# Altium PCB my.PcbDoc (part 3 of 3)
Units mm, origin at the board's own origin, x right, y up, seen from the top; angles counter-clockwise.
Board outline 100 x 100 mm, 4 copper layers (Top Layer, Internal Plane 1, Internal Plane 2, Bottom Layer); 136 components, 166 nets, 575 pads, 210 vias.
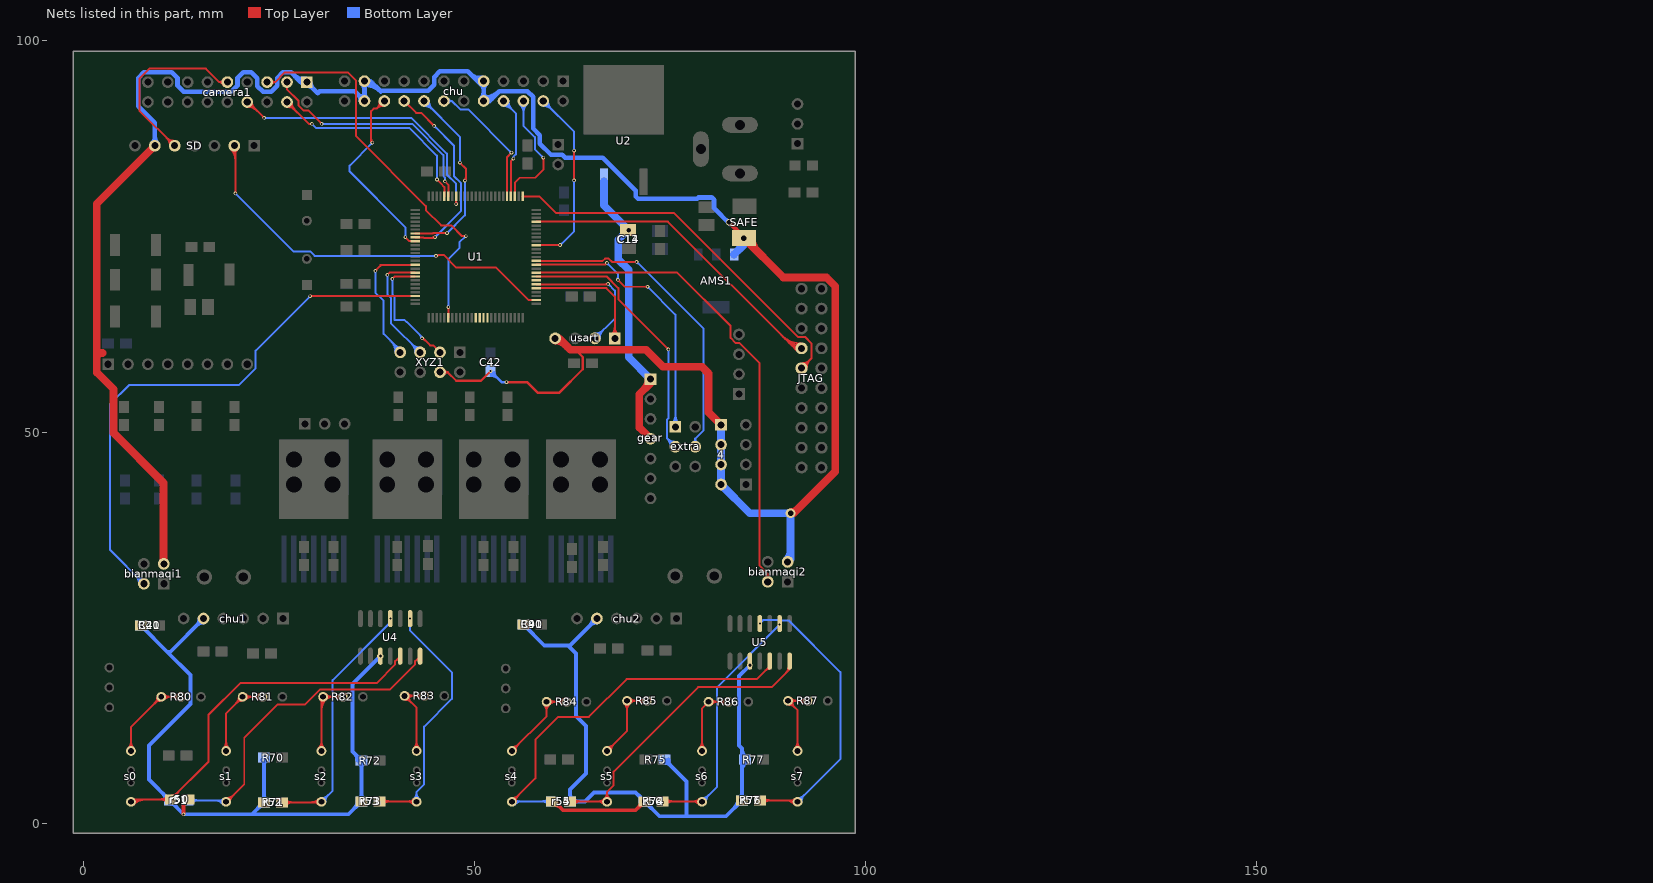
[diagram p5: the nets of this part, all layers, seen from the top]

## Via types
v1: diameter 0.457, hole 0.254, Top Layer to Bottom Layer, 170 vias
v2: diameter 3.5, hole 3, Top Layer to Bottom Layer, 12 vias
v3: diameter 0.8, hole 0.6, Top Layer to Bottom Layer, 7 vias
v4: diameter 1.27, hole 0.711, Top Layer to Bottom Layer, 6 vias
v5: diameter 1, hole 0.6, Top Layer to Bottom Layer, 5 vias
v6: diameter 2.5, hole 2.5, Top Layer to Bottom Layer, tented bottom, 4 vias
v7: diameter 0.7, hole 0.5, Top Layer to Bottom Layer, 2 vias
v8: diameter 0.8, hole 0.4, Top Layer to Bottom Layer, 2 vias
v9: diameter 0.7, hole 0.4, Top Layer to Bottom Layer, 1 vias
v10: diameter 1.2, hole 0.8, Top Layer to Bottom Layer, 1 vias

## Nets (pads, with @x,y where several pads share a name; then routed paths per layer and width w, separated by ;. In a path a pad name is that pad's centre, name@x,y a point inside that pad or via, vN(x,y) a via of type N, cw(c..) or ccw(c..) an arc to the next point about the centre after c; other vN are vias at no path point) (continued)
PC9: chu.4 U1.66 | length 29.9
  Top Layer w0.254: U1.66@57.938,73.913 60.959,73.913 v1(60.96,73.914) ; 60.712,73.913 ccw(c60.712,74.162) v1@60.888,73.986 ; 60.717,73.913 cw(c60.717,73.671) v1@60.888,73.842 ; v1@62.666,82.241 ccw(c62.493,82.414) 62.738,82.414 ccw(c62.983,82.414) v1@62.81,82.241 ; v1@62.666,85.907 cw(c62.493,85.734) 62.738,85.734 cw(c62.983,85.734) v1@62.81,85.907 ; v1(62.738,82.169) v1(62.738,85.979)
  Bottom Layer w0.254: chu.4@58.801,91.706 cw(c58.801,90.202) 59.865,91.265 cw(c60.928,92.329) chu.4@59.424,92.329 ; chu.4@58.801,91.96 cw(c58.801,91.069) 59.431,91.699 cw(c60.061,92.329) chu.4@59.17,92.329 ; chu.4@58.801,92.329 62.738,88.392 v1(62.738,85.979) ; v1(60.96,73.914) 62.738,75.692 v1(62.738,82.169) ; v1@60.96,74.016 ccw(c60.96,74.261) 61.133,74.087 ccw(c61.307,73.914) v1@61.062,73.914 ; v1@62.666,82.097 cw(c62.493,81.924) 62.738,81.924 cw(c62.983,81.924) v1@62.81,82.097 ; v1@62.666,86.051 ccw(c62.493,86.224) 62.738,86.224 ccw(c62.983,86.224) v1@62.81,86.051
PC10: chu.6 U1.78 | length 20.4
  Top Layer w0.254: U1.78@55.165,80.14 55.165,81.869 55.811,82.515 57.75,82.515 58.801,83.566 v1(58.801,85.09) ; v1@58.729,85.018 cw(c58.556,84.845) 58.801,84.845 cw(c59.046,84.845) v1@58.873,85.018
  Bottom Layer w0.254: chu.6@55.82,91.888 cw(c54.757,90.825) 56.261,90.825 cw(c57.765,90.825) chu.6@56.702,91.888 ; chu.6@56,92.068 cw(c55.37,91.438) 56.261,91.438 cw(c57.152,91.438) chu.6@56.522,92.068 ; chu.6@56.261,92.329 56.261,89.175 57.733,87.703 57.733,86.158 v1(58.801,85.09) ; v1@58.699,85.09 ccw(c58.454,85.09) 58.628,85.263 ccw(c58.801,85.437) v1@58.801,85.192
PC11: chu.8 U1.79 | length 16.9
  Top Layer w0.254: U1.79@54.665,80.14 54.665,84.637 v1(54.991,84.963)
  Bottom Layer w0.254: chu.8@53.721,91.706 cw(c53.721,90.202) 54.785,91.265 cw(c55.848,92.329) chu.8@54.344,92.329 ; chu.8@53.721,91.96 cw(c53.721,91.069) 54.351,91.699 cw(c54.981,92.329) chu.8@54.09,92.329 ; chu.8@53.721,92.329 55.293,90.757 55.293,85.495 54.991,85.193 v1(54.991,84.963)
PC12: chu.14 U1.80 | length 18.7
  Top Layer w0.254: U1.80@54.165,80.14 54.165,85.153 v1(54.737,85.725)
  Bottom Layer w0.254: chu.14@46.101,92.329 47.118,92.329 ; chu.14@46.656,92.046 cw(c47.118,91.811) 47.118,92.329 ; chu.14@46.656,92.612 ccw(c47.118,92.847) 47.118,92.329 ; v1@54.635,85.725 ccw(c54.39,85.725) 54.564,85.898 ccw(c54.737,86.072) v1@54.737,85.827 ; v1(54.737,85.725) 49.21,91.252 48.195,91.252 47.118,92.329
PC13: chu.16 U1.7 | length 30.1
  Top Layer w0.254: U1.7@42.415,75.39 44.652,75.39 44.738,75.476 45.198,75.476 45.236,75.438 46.228,75.438 ; 46.223,75.438 cw(c46.223,75.159) v1@46.42,75.356 ; v1@48.133,84.455 v1(48.143,84.445) 48.952,83.636 48.952,82.333 v1(48.778,82.159) ; v1@48.143,84.343 cw(c48.143,84.098) 48.316,84.272 cw(c48.49,84.445) v1@48.245,84.445 ; v1@48.706,82.231 ccw(c48.112,82.825) 48.952,82.825
  Bottom Layer w0.254: chu.16@43.561,91.706 cw(c43.561,90.202) 44.625,91.265 cw(c45.688,92.329) chu.16@44.184,92.329 ; chu.16@43.561,91.96 cw(c43.561,91.069) 44.191,91.699 cw(c44.821,92.329) chu.16@43.93,92.329 ; chu.16@43.561,92.329 48.143,87.747 v1(48.143,84.445) ; v1(46.492,75.428) 48.768,77.704 v1@48.768,82.169 ; v1@46.492,75.53 ccw(c46.492,75.775) 46.665,75.601 ccw(c46.839,75.428) v1@46.594,75.428 ; v1@48.071,84.517 ccw(c47.898,84.69) 48.143,84.69 ccw(c48.388,84.69) v1@48.215,84.517 ; 48.768,81.89 cw(c49.047,81.89) v1@48.85,82.087
PC14: chu.18 U1.8 | length 26.2
  Top Layer w0.254: chu.18@41.021,92.329 41.027,92.329 42.558,90.798 43.187,90.798 v1@44.831,89.154 ; U1.8@42.415,74.89 43.481,74.89 43.547,74.824 44.872,74.824 v1(44.968,74.92) ; 44.492,74.824 ccw(c44.492,75.396) v1@44.896,74.992 ; v1@44.739,89.144 ccw(c44.494,89.144) 44.668,89.317 ccw(c44.841,89.491) v1@44.841,89.246
  Bottom Layer w0.254: v1@44.841,89.042 cw(c44.841,88.797) 45.014,88.971 cw(c45.188,89.144) v1@44.943,89.144 ; v1(44.841,89.144) 47.387,86.598 47.387,82.727 48.26,81.854 48.26,78.232 v1@44.958,74.93 ; v1@45.07,74.92 cw(c45.363,74.92) 45.156,75.128
PC15: chu.20 U1.9 | length 28.7
  Top Layer w0.254: 36.782,87.662 ccw(c37.624,87.662) v1@37.029,87.067 ; v1(36.957,86.995) 36.782,87.17 36.782,91.035 37.108,91.361 37.513,91.361 ; chu.20@37.859,92.286 cw(c36.669,92.205) 37.513,91.361 ; chu.20@38.113,92.304 cw(c37.408,92.255) 37.907,91.755 cw(c38.407,91.256) chu.20@38.456,91.961 ; chu.20@38.438,91.707 ccw(c38.357,90.517) 37.513,91.361 ; chu.20@38.481,92.329 37.513,91.361 ; v1(41.177,74.916) 41.68,74.413 42.392,74.413 U1.9@42.415,74.39
  Bottom Layer w0.254: v1@36.855,86.995 cw(c36.61,86.995) 36.784,86.822 cw(c36.957,86.648) v1@36.957,86.893 ; v1(36.957,86.995) 34.036,84.074 34.036,83.312 41.177,76.171 v1(41.177,74.916) ; v1@41.105,74.987 ccw(c40.932,75.161) 41.177,75.161 ccw(c41.422,75.161) v1@41.249,74.987
PCLK: camera1.5 U1.31 | length 52.7
  Top Layer w0.254: camera1.5@23.495,94.742 24.512,94.742 ; camera1.5@24.05,94.459 cw(c24.512,94.224) 24.512,94.742 ; camera1.5@24.05,95.025 ccw(c24.512,95.26) 24.512,94.742 ; v1@46.593,65.912 cw(c46.42,65.739) 46.665,65.739 cw(c46.91,65.739) v1@46.737,65.912 ; v1@46.658,65.991 v1(46.665,65.984) U1.31@46.665,64.64 ; v1(48.895,75.057) 48.411,75.057 47.03,76.438 45.743,76.438 43.796,78.385 43.796,78.898 34.864,87.83 34.864,94.929 33.847,95.946 25.716,95.946 24.512,94.742
  Bottom Layer w0.254: v1@46.593,66.056 ccw(c46.42,66.229) 46.665,66.229 ccw(c46.91,66.229) v1@46.737,66.056 ; v1(46.665,65.984) 46.665,72.112 48.079,73.526 48.079,74.241 v1(48.895,75.057) ; v1@48.793,75.057 cw(c48.548,75.057) 48.722,74.884 cw(c48.895,74.71) v1@48.895,74.955
PD10: U1.57
PD11: extra.3 U1.58 | length 39.1
  Top Layer w0.254: U1.58@57.915,69.89 66.918,69.89 68.399,68.409 68.399,66.983 v1(74.803,60.579) ; v1@74.701,60.579 ccw(c74.456,60.579) 74.63,60.752 ccw(c74.803,60.926) v1@74.803,60.681
  Bottom Layer w0.254: v1@74.731,60.507 cw(c74.558,60.334) 74.803,60.334 cw(c75.048,60.334) v1@74.875,60.507 ; v1(74.803,60.579) 74.803,51.746 74.615,51.558 74.615,49.21 extra.3@75.692,48.133 ; extra.3@75.069,48.133 ccw(c73.565,48.133) 74.628,49.197 ccw(c75.692,50.26) extra.3@75.692,48.756 ; extra.3@75.323,48.133 ccw(c74.432,48.133) 75.062,48.763 ccw(c75.692,49.393) extra.3@75.692,48.502
PD14: extra.1 U1.61 | length 41.1
  Top Layer w0.254: U1.61@57.915,71.39 57.938,71.413 66.714,71.413 v1(66.929,71.628) ; v1@68.326,69.367 cw(c68.326,69.122) 68.499,69.296 cw(c68.673,69.469) v1@68.428,69.469 ; v1(68.326,69.469) 69.215,68.58 v1(72.136,68.58) ; v1@72.064,68.508 ccw(c71.891,68.335) 71.891,68.58 ccw(c71.891,68.825) v1@72.064,68.652
  Bottom Layer w0.254: v1@66.929,71.526 cw(c66.929,71.281) 67.102,71.455 cw(c67.276,71.628) v1@67.031,71.628 ; v1(66.929,71.628) 68.326,70.231 v1(68.326,69.469) ; v1@68.254,69.541 ccw(c68.081,69.714) 68.326,69.714 ccw(c68.571,69.714) v1@68.398,69.541 ; v1@72.136,68.478 cw(c72.136,68.233) 72.309,68.407 cw(c72.483,68.58) v1@72.238,68.58 ; v1(72.136,68.58) 75.692,65.024 extra.1@75.692,50.673 ; extra.1@75.251,51.114 ccw(c74.188,52.177) 75.692,52.177 ccw(c77.196,52.177) extra.1@76.133,51.114 ; extra.1@75.431,50.934 ccw(c74.801,51.564) 75.692,51.564 ccw(c76.583,51.564) extra.1@75.953,50.934
PD15: extra.4 U1.62 | length 42.7
  Top Layer w0.254: U1.62@57.915,71.89 66.405,71.89 66.699,72.184 67.159,72.184 67.588,71.755 v1(70.739,71.755) ; v1@70.667,71.683 ccw(c70.494,71.51) 70.494,71.755 ccw(c70.494,72) v1@70.667,71.827
  Bottom Layer w0.254: v1@70.739,71.653 cw(c70.739,71.408) 70.912,71.582 cw(c71.086,71.755) v1@70.841,71.755 ; v1(70.739,71.755) 79.309,63.185 79.309,50.227 78.232,49.15 ; extra.4@77.949,48.688 ccw(c77.714,49.15) 78.232,49.15 ; extra.4@78.232,48.133 78.232,49.15 ; extra.4@78.515,48.688 cw(c78.75,49.15) 78.232,49.15
PE7: U1.38
PE8: U1.39
PE9: U1.40
PE10: U1.41
SCL: camera1.3 U1.95 | length 31.1
  Top Layer w0.254: camera1.3@26.035,94.742 26.035,93.853 27.498,92.39 27.498,91.756 28.129,91.125 28.763,91.125 v1(30.48,89.408) ; v1@30.378,89.408 ccw(c30.133,89.408) 30.307,89.581 ccw(c30.48,89.755) v1@30.48,89.51 ; v1(46.228,82.042) 46.665,81.605 U1.95@46.665,80.14
  Bottom Layer w0.254: v1(30.48,89.408) 42.03,89.408 46.028,85.41 46.028,82.743 46.228,82.543 v1(46.228,82.042) ; v1@30.552,89.336 cw(c30.725,89.163) 30.725,89.408 cw(c30.725,89.653) v1@30.552,89.48
SCLK0: SD.2 U1.52 | length 55.2
  Top Layer w0.254: SD.2@18.863,86.173 cw(c17.493,84.803) 19.431,84.803 ; SD.2@19.043,86.353 cw(c18.107,85.417) 19.431,85.417 cw(c20.501,85.417) SD.2@19.745,86.173 ; SD.2@19.304,86.614 19.431,86.487 v1(19.431,80.518) ; v1@19.359,80.59 ccw(c19.186,80.763) 19.431,80.763 ccw(c19.676,80.763) v1@19.503,80.59 ; v1@45.157,72.445 cw(c45.637,71.965) 45.637,72.644 ; 45.339,72.644 46.063,72.644 47.679,71.028 52.771,71.028 56.909,66.89 U1.52@57.915,66.89
  Bottom Layer w0.254: v1@19.431,80.416 cw(c19.431,80.171) 19.604,80.345 cw(c19.778,80.518) v1@19.533,80.518 ; v1(19.431,80.518) 26.851,73.098 28.996,73.098 29.577,72.517 v1(45.085,72.517) ; v1@45.013,72.445 ccw(c44.84,72.272) 44.84,72.517 ccw(c44.84,72.762) v1@45.013,72.589
SDA: camera1.4 U1.96 | length 31.8
  Top Layer w0.254: camera1.4@26.035,91.579 cw(c26.035,90.075) 27.099,91.138 cw(c28.162,92.202) camera1.4@26.658,92.202 ; camera1.4@26.035,91.833 cw(c26.035,90.942) 26.665,91.572 cw(c27.295,92.202) camera1.4@26.404,92.202 ; camera1.4@26.035,92.202 28.829,89.408 v1(29.21,89.408) ; v1(45.212,82.296) 45.672,81.836 45.672,81.812 46.165,81.319 U1.96@46.165,80.14
  Bottom Layer w0.254: v1(29.21,89.408) 29.766,88.852 30.71,88.852 30.758,88.9 41.656,88.9 45.212,85.344 v1(45.212,82.296) ; v1@45.14,82.368 ccw(c44.967,82.541) 45.212,82.541 ccw(c45.457,82.541) v1@45.284,82.368
ST0: r50.2 s0.4 U4.5 | length 64.6
  Top Layer w0.254: s0.4@6.088,2.731 6.406,3.05 r50.2@11.176,3.05 16,7.874 16.002,7.874 16.002,13.843 20.066,17.907 37.488,17.907 39.87,20.289 39.87,20.706 U4.5@40.513,21.349 ; 9.823,3.05 cw(c9.823,1.823) 10.69,2.69 ccw(c9.823,1.823) 9.823,3.05 ; 9.823,3.05 ccw(c9.823,4.276) 10.69,3.409 cw(c9.823,4.276) 9.823,3.05 ; s0.4@6.08,2.738 cw(c6.833,1.986) 6.833,3.05 ccw(c6.833,1.986) s0.4@6.08,2.738 ; s0.4@6.26,2.558 cw(c7.446,1.373) 7.446,3.05 ccw(c7.446,1.373) s0.4@6.26,2.558 ; s0.4@6.44,2.379 cw(c8.059,0.759) 8.059,3.05 ccw(c8.059,0.759) s0.4@6.44,2.379 ; r50.2@11.303,3.558 ccw(c11.303,4.477) 11.953,3.827 cw(c11.303,4.477) r50.2@11.303,3.558 ; r50.2@11.557,3.05 cw(c12.477,3.05) 11.826,3.7 ccw(c12.477,3.05) r50.2@11.557,3.05 ; r50.2@11.811,3.05 cw(c13.344,3.05) 12.26,4.134 ccw(c13.344,3.05) r50.2@11.811,3.05 ; 39.912,20.748 cw(c40.354,20.306) 40.696,20.829 ccw(c40.354,20.306) 39.912,20.748
ST1: r51.2 s1.4 U4.7 | length 57.6
  Top Layer w0.254: s1.4@18.263,2.731 18.352,2.731 20.574,4.953 20.574,10.922 24.854,15.202 28.359,15.202 30.263,17.106 39.227,17.106 42.41,20.289 42.41,20.706 U4.7@43.053,21.349 ; s1.4@18.263,2.975 ccw(c18.263,3.78) 18.832,3.211 cw(c18.263,3.78) s1.4@18.263,2.975 ; s1.4@18.263,3.229 ccw(c18.263,4.647) 19.265,3.644 cw(c18.263,4.647) s1.4@18.263,3.229 ; s1.4@18.761,2.731 cw(c19.747,2.731) 19.049,3.428 ccw(c19.747,2.731) s1.4@18.761,2.731 ; 42.452,20.748 cw(c42.894,20.306) 43.236,20.829 ccw(c42.894,20.306) 42.452,20.748
  Bottom Layer w0.254: r51.2@13.335,2.923 18.071,2.923 s1.4@18.263,2.731 ; 14.688,2.923 cw(c14.688,4.149) 13.821,3.282 ccw(c14.688,4.149) 14.688,2.923 ; 14.688,2.923 ccw(c14.688,1.696) 13.821,2.563 cw(c14.688,1.696) 14.688,2.923 ; 16.598,2.923 cw(c16.598,1.066) 17.91,2.379 ccw(c16.598,1.066) 16.598,2.923 ; 17.211,2.923 cw(c17.211,1.679) 18.09,2.558 ccw(c17.211,1.679) 17.211,2.923 ; 17.523,2.923 ccw(c17.523,3.471) 17.91,3.083 cw(c17.523,3.471) 17.523,2.923
ST2: r52.2 s2.4 U4.11 | length 44.8
  Top Layer w0.254: r52.2@25.4,2.665 30.372,2.665 s2.4@30.438,2.731 ; 26.753,2.665 cw(c26.753,3.892) 25.886,3.025 ccw(c26.753,3.892) 26.753,2.665 ; 26.753,2.665 ccw(c26.753,1.439) 25.886,2.306 cw(c26.753,1.439) 26.753,2.665 ; 29.077,2.665 ccw(c29.077,4.092) 30.085,3.083 cw(c29.077,4.092) 29.077,2.665 ; 29.394,2.665 cw(c29.394,1.687) 30.085,2.379 ccw(c29.394,1.687) 29.394,2.665 ; 29.69,2.665 ccw(c29.69,3.478) 30.265,2.904 cw(c29.69,3.478) 29.69,2.665
  Bottom Layer w0.254: s2.4@30.438,2.731 31.877,4.17 31.877,18.288 39.243,25.654 v1(39.243,26.162) ; 31.288,3.581 cw(c30.438,4.431) 30.438,3.229 ccw(c30.438,4.431) 31.288,3.581 ; 31.288,3.581 ccw(c32.138,2.731) 30.936,2.731 cw(c32.138,2.731) 31.288,3.581
ST3: r53.2 s3.4 U4.9 | length 45.7
  Top Layer w0.254: r53.2@37.846,2.792 42.551,2.792 s3.4@42.613,2.731 ; 39.199,2.792 cw(c39.199,4.019) 38.332,3.152 ccw(c39.199,4.019) 39.199,2.792 ; 39.199,2.792 ccw(c39.199,1.566) 38.332,2.433 cw(c39.199,1.566) 39.199,2.792 ; 41.262,2.792 cw(c41.262,1.381) 42.26,2.379 ccw(c41.262,1.381) 41.262,2.792 ; 41.558,2.792 ccw(c41.558,3.785) 42.26,3.083 cw(c41.558,3.785) 41.558,2.792 ; 41.875,2.792 cw(c41.875,1.994) 42.44,2.558 ccw(c41.875,1.994) 41.875,2.792
  Bottom Layer w0.254: v1(41.783,26.162) 41.783,24.612 47.104,19.291 47.104,15.887 43.565,12.348 43.565,4.963 42.613,4.011 s3.4@42.613,2.731 ; 41.783,25.917 cw(c42.028,25.917) 41.855,26.09 ccw(c42.028,25.917) 41.783,25.917 ; 41.783,25.917 ccw(c41.538,25.917) 41.711,26.09 cw(c41.538,25.917) 41.783,25.917 ; 42.613,3.933 cw(c41.41,3.933) 42.26,3.083 ccw(c41.41,3.933) 42.613,3.933 ; 42.613,3.933 ccw(c43.815,3.933) 42.965,3.083 cw(c43.815,3.933) 42.613,3.933
ST4: r54.2 s4.4 U5.5 | length 62.8
  Top Layer w0.254: s4.4@54.788,2.731 57.785,5.729 57.785,10.668 60.706,13.589 64.643,13.589 69.469,18.415 86.106,18.415 87.757,20.066 U5.5@87.757,20.714 ; 55.638,3.581 cw(c54.788,4.431) 54.788,3.229 ccw(c54.788,4.431) 55.638,3.581 ; 55.638,3.581 ccw(c56.488,2.731) 55.286,2.731 cw(c56.488,2.731) 55.638,3.581 ; 87.202,19.511 cw(c87.757,18.956) 87.757,19.741 ccw(c87.757,18.956) 87.202,19.511
  Bottom Layer w0.254: s4.4@54.788,2.731 54.849,2.792 r54.2@59.944,2.792 ; 58.591,2.792 cw(c58.591,1.566) 59.458,2.433 ccw(c58.591,1.566) 58.591,2.792 ; 58.591,2.792 ccw(c58.591,4.019) 59.458,3.152 cw(c58.591,4.019) 58.591,2.792 ; s4.4@54.96,2.558 cw(c55.525,1.994) 55.525,2.792 ccw(c55.525,1.994) s4.4@54.96,2.558 ; s4.4@55.14,2.379 cw(c56.138,1.381) 56.138,2.792 ccw(c56.138,1.381) s4.4@55.14,2.379 ; s4.4@55.14,3.083 ccw(c55.842,3.785) 55.842,2.792 cw(c55.842,3.785) s4.4@55.14,3.083
ST5: r55.2 s5.4 U5.7 | length 52.1
  Top Layer w0.254: r55.2@62.23,2.792 66.901,2.792 s5.4@66.963,2.731 66.963,4.011 67.79,4.838 67.79,6.576 78.613,17.399 88.011,17.399 90.297,19.685 U5.7@90.297,20.714 ; 63.583,2.792 cw(c63.583,4.019) 62.716,3.152 ccw(c63.583,4.019) 63.583,2.792 ; 63.583,2.792 ccw(c63.583,1.566) 62.716,2.433 cw(c63.583,1.566) 63.583,2.792 ; s5.4@66.61,3.083 cw(c65.908,3.785) 65.908,2.792 ccw(c65.908,3.785) s5.4@66.61,3.083 ; s5.4@66.61,3.083 ccw(c65.76,3.933) 66.963,3.933 ; s5.4@66.61,3.083 ccw(c65.76,3.933) 66.963,3.933 ; 66.963,3.933 ccw(c68.165,3.933) 67.315,3.083 cw(c68.165,3.933) 66.963,3.933 ; 65.612,2.792 cw(c65.612,1.381) 66.61,2.379 ccw(c65.612,1.381) 65.612,2.792 ; 66.225,2.792 cw(c66.225,1.994) 66.79,2.558 ccw(c66.225,1.994) 66.225,2.792 ; 89.84,19.228 ccw(c89.153,19.914) 90.124,19.914 cw(c89.153,19.914) 89.84,19.228
ST6: r56.2 s6.4 U5.9 | length 45.3
  Top Layer w0.254: r56.2@74.041,2.792 79.039,2.792 s6.4@79.1,2.731 ; 75.394,2.792 cw(c75.394,4.019) 74.527,3.152 ccw(c75.394,4.019) 75.394,2.792 ; 75.394,2.792 ccw(c75.394,1.566) 74.527,2.433 cw(c75.394,1.566) 75.394,2.792 ; 77.75,2.792 cw(c77.75,1.381) 78.748,2.379 ccw(c77.75,1.381) 77.75,2.792 ; 78.046,2.792 ccw(c78.046,3.785) 78.748,3.083 cw(c78.046,3.785) 78.046,2.792 ; 78.363,2.792 cw(c78.363,1.994) 78.927,2.558 ccw(c78.363,1.994) 78.363,2.792
  Bottom Layer w0.254: s6.4@79.1,2.731 81.026,4.657 81.026,17.399 v1(89.027,25.4) ; 79.95,3.581 cw(c79.1,4.431) 79.1,3.229 ccw(c79.1,4.431) 79.95,3.581 ; 79.95,3.581 ccw(c80.8,2.731) 79.598,2.731 cw(c80.8,2.731) 79.95,3.581 ; 88.854,25.227 cw(c89.027,25.053) 89.027,25.298 ccw(c89.027,25.053) 88.854,25.227 ; 88.854,25.227 ccw(c88.68,25.4) 88.925,25.4 cw(c88.68,25.4) 88.854,25.227
ST7: r57.2 s7.4 U5.11 | length 50.3
  Top Layer w0.254: r57.2@86.487,2.919 91.124,2.919 s7.4@91.312,2.731 ; 87.84,2.919 cw(c87.84,4.146) 86.973,3.279 ccw(c87.84,4.146) 87.84,2.919 ; 87.84,2.919 ccw(c87.84,1.693) 86.973,2.56 cw(c87.84,1.693) 87.84,2.919 ; 89.655,2.919 cw(c89.655,1.074) 90.96,2.379 ccw(c89.655,1.074) 89.655,2.919 ; 90.269,2.919 cw(c90.269,1.687) 91.14,2.558 ccw(c90.269,1.687) 90.269,2.919 ; 90.565,2.919 ccw(c90.565,3.479) 90.96,3.083 cw(c90.565,3.479) 90.565,2.919
  Bottom Layer w0.254: v1(86.487,25.527) 86.916,25.956 89.257,25.956 89.305,25.908 90.17,25.908 96.774,19.304 96.774,8.193 s7.4@91.312,2.731 ; 92.163,3.581 cw(c91.312,4.431) 91.312,3.229 ccw(c91.312,4.431) 92.163,3.581 ; 92.163,3.581 ccw(c93.013,2.731) 91.81,2.731 cw(c93.013,2.731) 92.163,3.581
T0: R80.2 R80.3 s0.1 | length 26.2
  Top Layer w0.254: s0.1@6.088,9.231 6.088,12.285 R80.3@9.957,16.154 R80.2@12.497,16.154 ; 6.088,10.433 cw(c4.885,10.433) 5.735,9.583 ccw(c4.885,10.433) 6.088,10.433 ; 6.088,10.433 ccw(c7.29,10.433) 6.44,9.583 cw(c7.29,10.433) 6.088,10.433 ; 9.107,15.304 cw(c9.957,14.454) 9.957,15.656 ccw(c9.957,14.454) 9.107,15.304 ; 9.107,15.304 ccw(c8.257,16.154) 9.459,16.154 cw(c8.257,16.154) 9.107,15.304 ; 11.159,16.154 cw(c11.159,17.357) 10.309,16.507 ccw(c11.159,17.357) 11.159,16.154 ; 11.159,16.154 ccw(c11.159,14.952) 10.309,15.802 cw(c11.159,14.952) 11.159,16.154 ; 11.295,16.154 cw(c11.295,14.952) 12.145,15.802 ccw(c11.295,14.952) 11.295,16.154 ; 11.295,16.154 ccw(c11.295,17.357) 12.145,16.507 cw(c11.295,17.357) 11.295,16.154
T1: R81.2 R81.3 s1.1 | length 25.4
  Top Layer w0.254: s1.1@18.263,9.231 18.263,14.046 R81.3@20.371,16.154 R81.2@22.911,16.154 ; 18.263,10.433 cw(c17.06,10.433) 17.91,9.583 ccw(c17.06,10.433) 18.263,10.433 ; 18.263,10.433 ccw(c19.465,10.433) 18.615,9.583 cw(c19.465,10.433) 18.263,10.433 ; 19.521,15.304 cw(c20.371,14.454) 20.371,15.656 ccw(c20.371,14.454) 19.521,15.304 ; 19.521,15.304 ccw(c18.671,16.154) 19.873,16.154 cw(c18.671,16.154) 19.521,15.304 ; 21.573,16.154 cw(c21.573,17.357) 20.723,16.507 ccw(c21.573,17.357) 21.573,16.154 ; 21.573,16.154 ccw(c21.573,14.952) 20.723,15.802 cw(c21.573,14.952) 21.573,16.154 ; 21.709,16.154 cw(c21.709,14.952) 22.559,15.802 ccw(c21.709,14.952) 21.709,16.154 ; 21.709,16.154 ccw(c21.709,17.357) 22.559,16.507 cw(c21.709,17.357) 21.709,16.154
T2: R82.2 R82.3 s2.1 | length 26.8
  Top Layer w0.254: s2.1@30.438,9.231 30.438,15.934 R82.3@30.658,16.154 R82.2@33.198,16.154 ; 30.438,10.433 cw(c29.235,10.433) 30.085,9.583 ccw(c29.235,10.433) 30.438,10.433 ; 30.438,10.433 ccw(c31.64,10.433) 30.79,9.583 cw(c31.64,10.433) 30.438,10.433 ; R82.3@31.01,15.802 cw(c31.86,14.952) 31.86,16.154 ; R82.3@31.01,15.802 ccw(c32.392,14.42) 30.438,14.42 cw(c32.392,14.42) R82.3@31.01,15.802 ; R82.3@31.01,15.802 cw(c31.86,14.952) 31.86,16.154 ; 31.86,16.154 cw(c31.86,17.357) 31.01,16.507 ccw(c31.86,17.357) 31.86,16.154 ; 31.996,16.154 cw(c31.996,14.952) 32.846,15.802 ccw(c31.996,14.952) 31.996,16.154 ; 31.996,16.154 ccw(c31.996,17.357) 32.846,16.507 cw(c31.996,17.357) 31.996,16.154 ; R82.3@30.306,15.802 cw(c29.987,15.484) 30.438,15.484 ccw(c29.987,15.484) R82.3@30.306,15.802 ; 30.438,15.033 cw(c31.779,15.033) 30.83,15.982 ccw(c31.779,15.033) 30.438,15.033
T3: R83.2 R83.3 s3.1 | length 25.3
  Top Layer w0.254: s3.1@42.613,9.231 42.613,14.741 R83.3@41.072,16.281 R83.2@43.612,16.281 ; 41.922,15.431 cw(c42.772,16.281) 41.57,16.281 ccw(c42.772,16.281) 41.922,15.431 ; 41.922,15.431 ccw(c41.072,14.581) 41.072,15.783 cw(c41.072,14.581) 41.922,15.431 ; 42.274,16.281 cw(c42.274,17.484) 41.424,16.634 ccw(c42.274,17.484) 42.274,16.281 ; 42.274,16.281 ccw(c42.274,15.079) 41.424,15.929 cw(c42.274,15.079) 42.274,16.281 ; 42.41,16.281 cw(c42.41,15.079) 43.26,15.929 ccw(c42.41,15.079) 42.41,16.281 ; 42.41,16.281 ccw(c42.41,17.484) 43.26,16.634 cw(c42.41,17.484) 42.41,16.281 ; 42.613,10.433 cw(c41.41,10.433) 42.26,9.583 ccw(c41.41,10.433) 42.613,10.433 ; 42.613,10.433 ccw(c43.815,10.433) 42.965,9.583 cw(c43.815,10.433) 42.613,10.433
T4: R84.2 R84.3 s4.1 | length 25.8
  Top Layer w0.254: s4.1@54.788,9.231 59.233,13.676 R84.3@59.233,15.519 R84.2@61.773,15.519 ; 55.638,10.081 cw(c54.788,10.931) 54.788,9.729 ccw(c54.788,10.931) 55.638,10.081 ; 55.638,10.081 ccw(c56.488,9.231) 55.286,9.231 cw(c56.488,9.231) 55.638,10.081 ; 59.233,14.317 cw(c60.435,14.317) R84.3@59.585,15.167 ; 59.233,14.317 ccw(c58.031,14.317) 58.881,15.167 cw(c58.031,14.317) 59.233,14.317 ; 59.233,14.317 cw(c60.435,14.317) R84.3@59.585,15.167 ; R84.3@59.585,15.167 cw(c60.435,14.317) 60.435,15.519 ; R84.3@59.585,15.167 cw(c60.435,14.317) 60.435,15.519 ; 60.435,15.519 cw(c60.435,16.722) 59.585,15.872 ccw(c60.435,16.722) 60.435,15.519 ; 60.571,15.519 cw(c60.571,14.317) 61.421,15.167 ccw(c60.571,14.317) 60.571,15.519 ; 60.571,15.519 ccw(c60.571,16.722) 61.421,15.872 cw(c60.571,16.722) 60.571,15.519
T5: R85.2 R85.3 s5.1 | length 25.1
  Top Layer w0.254: s5.1@66.963,9.231 69.52,11.788 R85.3@69.52,15.646 R85.2@72.06,15.646 ; 67.813,10.081 cw(c66.963,10.931) 66.963,9.729 ccw(c66.963,10.931) 67.813,10.081 ; 67.813,10.081 ccw(c68.663,9.231) 67.461,9.231 cw(c68.663,9.231) 67.813,10.081 ; 69.52,14.444 cw(c70.722,14.444) R85.3@69.872,15.294 ; 69.52,14.444 ccw(c68.318,14.444) 69.168,15.294 cw(c68.318,14.444) 69.52,14.444 ; 69.52,14.444 cw(c70.722,14.444) R85.3@69.872,15.294 ; R85.3@69.872,15.294 cw(c70.722,14.444) 70.722,15.646 ; R85.3@69.872,15.294 cw(c70.722,14.444) 70.722,15.646 ; 70.722,15.646 cw(c70.722,16.849) 69.872,15.999 ccw(c70.722,16.849) 70.722,15.646 ; 70.858,15.646 cw(c70.858,14.444) 71.708,15.294 ccw(c70.858,14.444) 70.858,15.646 ; 70.858,15.646 ccw(c70.858,16.849) 71.708,15.999 cw(c70.858,16.849) 70.858,15.646
T6: R86.2 R86.3 s6.1 | length 20.5
  Top Layer w0.254: s6.1@79.1,9.231 79.1,14.686 R86.3@79.934,15.519 R86.2@82.474,15.519 ; 79.1,10.433 cw(c77.898,10.433) 78.748,9.583 ccw(c77.898,10.433) 79.1,10.433 ; 79.1,10.433 ccw(c80.302,10.433) 79.452,9.583 cw(c80.302,10.433) 79.1,10.433 ; 81.136,15.519 cw(c81.136,16.722) 80.286,15.872 ccw(c81.136,16.722) 81.136,15.519 ; 81.136,15.519 ccw(c81.136,14.317) 80.286,15.167 cw(c81.136,14.317) 81.136,15.519 ; 81.272,15.519 cw(c81.272,14.317) 82.122,15.167 ccw(c81.272,14.317) 81.272,15.519 ; 81.272,15.519 ccw(c81.272,16.722) 82.122,15.872 cw(c81.272,16.722) 81.272,15.519
T7: R87.2 R87.3 s7.1 | length 24.6
  Top Layer w0.254: s7.1@91.312,9.231 91.312,14.428 R87.3@90.094,15.646 R87.2@92.634,15.646 ; 90.944,14.796 cw(c91.794,15.646) 90.592,15.646 ccw(c91.794,15.646) 90.944,14.796 ; 90.944,14.796 ccw(c90.094,13.946) 90.094,15.148 cw(c90.094,13.946) 90.944,14.796 ; 91.296,15.646 cw(c91.296,16.849) 90.446,15.999 ccw(c91.296,16.849) 91.296,15.646 ; 91.296,15.646 ccw(c91.296,14.444) 90.446,15.294 cw(c91.296,14.444) 91.296,15.646 ; 91.312,10.433 cw(c90.11,10.433) 90.96,9.583 ccw(c90.11,10.433) 91.312,10.433 ; 91.312,10.433 ccw(c92.515,10.433) 91.665,9.583 cw(c92.515,10.433) 91.312,10.433 ; 91.432,15.646 cw(c91.432,14.444) 92.282,15.294 ccw(c91.432,14.444) 91.432,15.646 ; 91.432,15.646 ccw(c91.432,16.849) 92.282,15.999 cw(c91.432,16.849) 91.432,15.646
TCK: JTAG.9 U1.76 | length 52.2
  Top Layer w0.254: U1.76@56.165,80.14 58.29,80.14 60.452,77.978 75.528,77.978 91.337,62.169 92.263,62.169 93.091,61.341 93.091,59.436 JTAG.9@91.821,58.166 ; JTAG.9@91.858,58.535 ccw(c91.858,59.336) 92.424,58.769 ; JTAG.9@91.858,58.789 ccw(c91.858,60.203) 92.858,59.203 ; JTAG.9@92.227,58.166 cw(c93.209,58.166) 92.515,58.86 ; JTAG.9@92.481,58.166 cw(c94.076,58.166) 92.948,59.293
TMS: JTAG.7 U1.72 | length 49.8
  Top Layer w0.254: U1.72@57.915,76.89 57.938,76.913 74.725,76.913 90.932,60.706 JTAG.7@91.821,60.706 ; 89.266,62.372 ccw(c91.784,64.889) JTAG.7@91.784,61.329 ; 89.7,61.938 ccw(c91.784,64.022) JTAG.7@91.784,61.075 ; 90.134,61.504 ccw(c91.784,63.155) JTAG.7@91.784,60.821 ; 90.567,61.071 ccw(c91.784,62.287) JTAG.7@91.784,60.567 ; 91.001,60.637 ccw(c91.784,61.42) JTAG.7@91.784,60.313
"USART RX": U1.56 usart.2 | length 22.1
  Top Layer w0.254: U1.56@57.915,68.89 67.112,68.89 v1@67.148,68.926 ; 66.722,68.89 ccw(c66.722,69.301) v1@67.012,69.01
  Bottom Layer w0.254: usart.2@65.405,61.976 67.945,64.516 67.945,68.078 v1(67.084,68.939) ; usart.2@65.405,62.345 ccw(c65.405,63.236) 66.035,62.606 ccw(c66.665,61.976) usart.2@65.774,61.976 ; usart.2@65.405,62.599 ccw(c65.405,64.103) 66.469,63.04 ccw(c67.532,61.976) usart.2@66.028,61.976 ; v1@67.084,68.837 cw(c67.084,68.592) 67.257,68.765 cw(c67.431,68.939) v1@67.186,68.939
"USART TX": U1.55 usart.1 | length 19.6
  Top Layer w0.254: U1.55@57.915,68.39 66.865,68.39 67.945,67.31 usart.1@67.945,61.976 ; usart.1@67.504,62.417 ccw(c66.441,63.48) 67.945,63.48 ccw(c69.449,63.48) usart.1@68.386,62.417 ; usart.1@67.684,62.237 ccw(c67.054,62.867) 67.945,62.867 ccw(c68.836,62.867) usart.1@68.206,62.237
VCC: 4.1 4.2 4.3 4.4 AMS1.3 bianmaqi1.3 bianmaqi2.3 C42.1 camera1.1 chu.9 chu.10 chu.21 chu.22 SAFE.1 SD.6 usart.4 XYZ1.4 | length 346.1
  Top Layer w0.3: XYZ1.4@45.593,57.658 46.577,57.658 ; XYZ1.4@46.126,57.383 cw(c46.577,57.151) 46.577,57.658 ; XYZ1.4@46.126,57.933 ccw(c46.577,58.165) 46.577,57.658 ; v1(52.068,57.785) 50.841,56.558 47.677,56.558 46.577,57.658 ; v1(54.102,56.388) 56.72,56.388 58.058,55.05 60.877,55.05 63.85,58.023 63.85,59.583 62.907,60.526 62.557,60.876 61.914,60.876 61.425,60.876 usart.4@60.325,61.976 ; usart.4@60.325,61.376 cw(c60.325,59.927) 61.349,60.952 cw(c62.374,61.976) usart.4@60.925,61.976
  Top Layer w0.6: v3(82.55,76.835) 84.455,74.93 v4(84.455,74.803) ; 83.3,76.085 cw(c82.018,74.803) SAFE.1@83.831,74.803 ; SAFE.1@83.793,75.592 cw(c83.005,74.803) SAFE.1@84.12,74.803
  Top Layer w1: 2.443,60.124 2.135,60.124 1.725,59.714 ; SD.6@9.144,86.614 1.725,79.195 1.725,59.714 ; bianmaqi1.3@10.287,33.147 10.247,33.187 10.247,43.501 3.874,49.875 3.874,55.485 1.725,57.634 1.725,59.714 ; usart.4@60.325,61.726 cw(c60.325,59.941) 61.587,61.203 ; usart.4@60.325,61.976 60.814,61.976 61.914,60.876 62.264,60.526 62.907,60.526 71.935,60.526 74.115,58.346 79.087,58.346 79.936,57.497 79.936,52.525 4.1@81.534,50.927 ; v4(84.455,74.803) 89.482,69.776 94.999,69.776 96.139,68.636 96.139,44.958 90.805,39.624 v4(90.424,39.624) ; SAFE.1@85.479,74.803 ccw(c87.951,74.803) 86.203,73.055 ; v4@90.424,39.759 ccw(c90.424,41.005) 91.305,40.124
  Bottom Layer w0.3: C42.1@52.068,57.173 cw(c52.068,55.695) 53.113,56.74 ; C42.1@52.068,57.473 cw(c52.068,56.72) C42.1@52.601,57.252 ; v1(52.068,57.785) 53.465,56.388 v1(54.102,56.388) ; C42.1@52.553,57.658 ccw(c53.418,57.658) 52.807,57.047
  Bottom Layer w0.6: SD.6@8.826,86.932 ccw(c8.058,87.7) 9.144,87.7 ccw(c10.23,87.7) SD.6@9.462,86.932 ; SD.6@9.144,86.614 9.144,89.545 7.005,91.684 7.005,95.26 7.737,95.992 11.313,95.992 12.045,95.26 12.045,94.264 12.817,93.492 18.933,93.492 19.705,94.264 19.705,95.26 20.437,95.992 21.473,95.992 22.245,95.22 22.245,94.224 22.977,93.492 24.013,93.492 24.785,94.264 24.785,95.26 25.517,95.992 26.553,95.992 27.803,94.742 camera1.1@28.575,94.742 29.972,93.345 30.206,93.579 34.691,93.579 chu.22@35.941,92.329 chu.21@35.941,94.869 36.713,94.869 37.963,93.619 44.079,93.619 44.851,94.391 44.851,95.387 45.583,96.119 49.159,96.119 51.181,94.097 chu.10@51.181,92.329 51.953,92.329 53.203,93.579 ; 26.939,95.606 ccw(c28.082,96.749) camera1.1@28.468,95.179 ; 27.692,94.853 ccw(c28.379,95.54) camera1.1@28.611,94.596 ; camera1.1@28.575,94.292 cw(c28.575,93.206) 29.343,93.974 cw(c30.111,94.742) camera1.1@29.025,94.742 ; chu.22@35.491,92.329 ccw(c34.405,92.329) 35.173,93.097 ccw(c35.941,93.865) chu.22@35.941,92.779 ; chu.22@35.623,92.647 ccw(c34.855,93.415) 35.941,93.415 ccw(c37.027,93.415) chu.22@36.259,92.647 ; chu.21@35.623,94.551 cw(c34.855,93.783) 35.941,93.783 cw(c37.027,93.783) chu.21@36.259,94.551 ; chu.21@35.941,94.419 cw(c35.941,91.468) 38.027,93.555 ; chu.21@35.941,95.019 cw(c35.941,93.517) 37.003,94.579 ; 49.545,95.733 ccw(c50.688,96.876) chu.9@51.074,95.306 ; 50.298,94.98 ccw(c50.985,95.667) chu.9@51.217,94.723 ; chu.10@50.863,92.647 ccw(c50.095,93.415) 51.181,93.415 ccw(c52.267,93.415) chu.10@51.499,92.647 ; chu.9@50.863,94.551 cw(c50.095,93.783) 51.181,93.783 cw(c52.267,93.783) chu.9@51.499,94.551 ; chu.10@51.177,92.179 ccw(c51.216,93.595) 52.218,92.593 ; chu.10@51.193,92.779 ccw(c51.269,95.513) 53.203,93.579 ; 82.162,77.096 ccw(c82.55,77.483) v3@82.55,76.935 ; v3@82.655,76.603 80.635,78.623 80.635,79.709 80.342,80.002 78.658,80.002 78.48,79.824 70.921,79.824 70.628,80.117 70.628,80.883 66.421,85.09 61.585,85.09 61.224,85.451 59.789,85.451 58.36,86.88 58.36,87.963 57.511,88.811 57.511,92.847 56.779,93.579 53.203,93.579
  Bottom Layer w1: 4.1@81.534,50.927 4.2@81.534,48.387 4.3@81.534,45.847 4.4@81.534,43.307 85.217,39.624 v4(90.424,39.624) 90.424,33.782 bianmaqi2.3@90.043,33.401 ; AMS1.3@83.199,72.717 84.455,73.973 v4(84.455,74.803) ; AMS1.3@83.638,73.156 ccw(c81.99,74.803) v4@84.32,74.803 ; bianmaqi2.3@89.866,33.578 ccw(c88.52,34.924) 90.424,34.924
VCC2: C21.2 chu1.5 R40.1 r50.1 r51.1 r52.1 r53.1 R70.1 R71.1 R72.1 R73.1 U4.3 | length 120.8
  Top Layer w0.5: v1(12.827,1.14) 12.827,2.415 r50.1@13.462,3.05
  Bottom Layer w0.5: v3(7.366,25.275) 10.732,21.908 ; R40.1@7.493,24.89 cw(c7.493,24.267) R40.1@7.933,24.707 ; R40.1@7.878,25.275 ccw(c9.114,25.275) 8.24,24.401 ; chu1.5@14.867,26.162 cw(c13.66,26.162) 14.513,25.308 cw(c15.367,24.455) chu1.5@15.367,25.662 ; chu1.5@15.367,26.162 11.113,21.908 10.732,21.908 ; R70.1@23.114,8.384 R71.1@23.114,2.669 21.588,1.143 ; v8(37.973,21.349) 34.417,17.793 34.417,9.146 R72.1@35.56,8.003 R73.1@35.56,2.794 33.909,1.143 21.588,1.143 ; 10.732,21.908 13.716,18.925 13.716,15.24 8.382,9.906 8.382,5.59 r51.1@11.049,2.923 12.829,1.143 21.588,1.143 ; 23.114,3.598 cw(c22.185,3.598) 22.842,2.941 ccw(c22.185,3.598) 23.114,3.598 ; 23.114,3.598 ccw(c24.043,3.598) 23.386,2.941 cw(c24.043,3.598) 23.114,3.598 ; 23.114,7.454 cw(c24.043,7.454) 23.386,8.111 ccw(c24.043,7.454) 23.114,7.454 ; 23.114,7.454 ccw(c22.185,7.454) 22.842,8.111 cw(c22.185,7.454) 23.114,7.454 ; 35.56,3.723 cw(c34.631,3.723) 35.288,3.066 ccw(c34.631,3.723) 35.56,3.723 ; 35.56,3.723 ccw(c36.489,3.723) 35.832,3.066 cw(c36.489,3.723) 35.56,3.723 ; 35.56,7.073 cw(c36.489,7.073) 35.832,7.73 ccw(c36.489,7.073) 35.56,7.073 ; 35.56,7.073 ccw(c34.631,7.073) 35.288,7.73 cw(c34.631,7.073) 35.56,7.073 ; 10.175,3.797 cw(c9.301,2.923) 10.537,2.923 ccw(c9.301,2.923) 10.175,3.797 ; r51.1@10.482,3.49 ccw(c10.922,3.93) 10.922,3.308 cw(c10.922,3.93) r51.1@10.482,3.49 ; r51.1@11.176,2.538 cw(c11.176,1.915) 11.616,2.355 ccw(c11.176,1.915) r51.1@11.176,2.538 ; r51.1@11.561,2.923 ccw(c12.797,2.923) 11.923,2.049 cw(c12.797,2.923) r51.1@11.561,2.923 ; 22.24,1.795 ccw(c21.366,2.669) 22.602,2.669 cw(c21.366,2.669) 22.24,1.795 ; R71.1@22.547,2.101 cw(c22.987,1.661) 22.987,2.284 ccw(c22.987,1.661) R71.1@22.547,2.101 ; 34.686,1.92 ccw(c33.812,2.794) 35.048,2.794 cw(c33.812,2.794) 34.686,1.92 ; 34.686,8.877 cw(c33.812,8.003) 35.048,8.003 ccw(c33.812,8.003) 34.686,8.877 ; R73.1@34.993,2.227 cw(c35.433,1.786) 35.433,2.409 ccw(c35.433,1.786) R73.1@34.993,2.227 ; R72.1@34.993,8.57 ccw(c35.433,9.01) 35.433,8.388 cw(c35.433,9.01) R72.1@34.993,8.57
  other v1: 23.114,2.665
  other v8: 35.56,2.792
VCC3: C13.1 C14.2 gear.1 gear.4 U2.3 | length 39.8
  Top Layer w1: 71.744,55.507 ccw(c70.482,56.769) gear.1@72.267,56.769 ; gear.4@72.517,49.149 71.067,50.599 71.067,54.83 72.517,56.28 gear.1@72.517,56.769
  Bottom Layer w1: U2.3@66.548,82.024 66.548,78.992 v5(69.721,75.819) 69.62,75.819 68.386,74.585 68.386,72.071 69.721,70.736 69.721,59.565 gear.1@72.517,56.769 ; C14.2@69.102,75.3 cw(c69.721,74.681) C14.2@69.721,75.557
VCC4: C90.2 chu2.5 R41.1 r54.1 r55.1 r56.1 r57.1 R74.1 R75.1 R76.1 R77.1 U5.3 | length 147.9
  Top Layer w0.5: r55.1@59.944,2.792 60.197,2.792 61.333,1.656 70.619,1.656 v4(71.755,2.792) ; 71.098,2.135 cw(c71.755,1.478) 71.755,2.407 ccw(c71.755,1.478) 71.098,2.135 ; 71.098,2.135 ccw(c70.441,2.792) 71.37,2.792 cw(c70.441,2.792) 71.098,2.135 ; r55.1@60.071,2.407 cw(c60.071,1.175) 60.943,2.046 ccw(c60.071,1.175) r55.1@60.071,2.407 ; r55.1@60.456,2.792 ccw(c61.082,2.792) 60.639,2.35 cw(c61.082,2.792) r55.1@60.456,2.792 ; 70.881,1.918 ccw(c70.007,2.792) 71.243,2.792 cw(c70.007,2.792) 70.881,1.918 ; r56.1@71.188,2.225 cw(c71.628,1.785) 71.628,2.407 ccw(c71.628,1.785) r56.1@71.188,2.225
  Bottom Layer w0.254: R76.1@84.201,2.924 R76.1@84.582,3.305 ; v9(85.217,20.193) 85.217,20.574
  Bottom Layer w0.5: v3(56.261,25.402) 58.93,22.733 61.976,22.733 ; R41.1@56.388,25.017 cw(c56.388,24.394) R41.1@56.828,24.834 ; R41.1@56.773,25.402 ccw(c58.009,25.402) 57.135,24.528 ; chu2.5@65.159,26.162 cw(c63.952,26.162) 64.805,25.308 cw(c65.659,24.455) chu2.5@65.659,25.662 ; chu2.5@65.659,26.162 62.23,22.733 61.976,22.733 ; R75.1@74.295,8.126 77.089,5.332 77.089,0.953 77.153,0.889 ; v4(84.201,2.919) R76.1@84.201,2.924 ; v9(85.217,20.193) 83.82,18.796 83.82,9.906 84.201,9.525 ; 61.976,22.733 62.992,21.717 62.992,13.716 64.262,12.446 64.262,6.35 62.23,4.318 r54.1@62.23,2.792 64.133,2.792 65.278,3.937 70.612,3.937 R74.1@71.755,2.794 73.66,0.889 77.153,0.889 ; 62.23,3.722 cw(c61.301,3.722) 61.958,3.065 ccw(c61.301,3.722) 62.23,3.722 ; 62.23,3.722 ccw(c63.159,3.722) 62.502,3.065 cw(c63.159,3.722) 62.23,3.722 ; 63.286,2.792 cw(c63.286,3.722) 62.629,3.065 ccw(c63.286,3.722) 63.286,2.792 ; 63.286,2.792 ccw(c63.286,1.863) 62.629,2.52 cw(c63.286,1.863) 63.286,2.792 ; 77.153,0.889 82.166,0.889 R76.1@84.201,2.924 ; R76.1@84.201,2.924 84.201,9.525 ; 84.201,3.849 cw(c83.272,3.849) 83.929,3.192 ccw(c83.272,3.849) 84.201,3.849 ; 84.201,3.849 ccw(c85.13,3.849) 84.473,3.192 cw(c85.13,3.849) 84.201,3.849 ; 84.201,3.854 cw(c83.272,3.854) 83.929,3.196 ccw(c83.272,3.854) 84.201,3.854 ; 84.201,3.854 ccw(c85.13,3.854) 84.473,3.196 cw(c85.13,3.854) 84.201,3.854 ; 84.201,9.525 ccw(c85.659,9.525) 84.707,8.421 cw(c85.659,9.525) 84.201,9.525 ; 70.881,3.668 cw(c70.007,2.794) 71.243,2.794 ccw(c70.007,2.794) 70.881,3.668 ; 71.097,3.452 cw(c70.437,2.792) 71.37,2.792 ccw(c70.437,2.792) 71.097,3.452 ; 71.101,3.448 ccw(c71.755,4.103) 71.755,3.177 cw(c71.755,4.103) 71.101,3.448 ; R74.1@71.188,3.361 ccw(c71.628,3.802) 71.628,3.179 cw(c71.628,3.802) R74.1@71.188,3.361 ; R74.1@71.755,2.407 cw(c71.755,1.474) 72.415,2.134 ccw(c71.755,1.474) R74.1@71.755,2.407 ; R74.1@71.882,2.409 cw(c71.882,1.786) 72.322,2.227 ccw(c71.882,1.786) R74.1@71.882,2.409 ; R74.1@72.14,2.792 ccw(c73.066,2.792) 72.411,2.138 cw(c73.066,2.792) R74.1@72.14,2.792 ; R74.1@72.267,2.794 ccw(c73.503,2.794) 72.629,1.92 cw(c73.503,2.794) R74.1@72.267,2.794 ; R75.1@74.422,7.741 cw(c74.422,7.119) 74.862,7.559 ccw(c74.422,7.119) R75.1@74.422,7.741 ; R75.1@74.807,8.126 ccw(c76.043,8.126) 75.169,7.252 cw(c76.043,8.126) R75.1@74.807,8.126 ; 83.327,2.05 ccw(c82.453,2.924) 83.689,2.924 cw(c82.453,2.924) 83.327,2.05 ; 83.535,2.259 cw(c84.201,1.593) 84.201,2.534 ccw(c84.201,1.593) 83.535,2.259 ; 83.547,2.27 ccw(c82.898,2.919) 83.816,2.919 cw(c82.898,2.919) 83.547,2.27 ; R76.1@83.634,2.357 cw(c84.074,1.916) 84.074,2.539 ccw(c84.074,1.916) R76.1@83.634,2.357 ; 84.201,6.587 cw(c85.998,6.587) 84.727,7.857 ccw(c85.998,6.587) 84.201,6.587
VSYNC: camera1.8 U1.93 | length 40.7
  Top Layer w0.254: camera1.8@20.955,91.579 cw(c20.955,89.768) 22.235,91.049 ; camera1.8@20.955,91.833 cw(c20.955,90.636) 21.802,91.482 ; camera1.8@20.955,92.202 21.082,92.202 v1@22.987,90.297 ; camera1.8@21.578,92.202 ccw(c22.775,92.202) 21.929,91.355 ; v1@23.012,90.17 ccw(c22.767,90.17) 22.941,90.343 ccw(c23.114,90.517) v1@23.114,90.272 ; v1@47.603,79.223 ccw(c47.43,79.396) 47.675,79.396 ccw(c47.92,79.396) v1@47.747,79.223 ; U1.93@47.665,80.14 47.675,80.13 v1(47.675,79.151)
  Bottom Layer w0.254: v1(23.114,90.17) 41.91,90.17 46.482,85.598 46.482,82.931 47.665,81.748 47.665,79.161 v1@47.625,79.121 ; v1@23.186,90.098 cw(c23.359,89.925) 23.359,90.17 cw(c23.359,90.415) v1@23.186,90.242 ; 47.665,79.42 ccw(c47.944,79.42) v1@47.747,79.223
VTO: camera1.9 SD.5 | length 27.8
  Top Layer w0.254: 10.58,87.694 ccw(c11.684,88.798) SD.5@11.684,87.237 ; 10.637,87.637 cw(c9.614,86.614) SD.5@11.061,86.614 ; 11.014,87.261 ccw(c11.684,87.931) SD.5@11.684,86.983 ; 11.071,87.203 cw(c10.481,86.614) SD.5@11.315,86.614 ; SD.5@11.684,86.614 11.66,86.614 7.178,91.096 7.178,95.188 8.456,96.466 15.674,96.466 17.398,94.742 ; camera1.9@17.86,94.459 ccw(c17.398,94.224) 17.398,94.742 ; camera1.9@17.86,95.025 cw(c17.398,95.26) 17.398,94.742 ; camera1.9@18.415,94.742 17.398,94.742
WHITE1: bianmaqi1.2 U1.23 | length 75.3
  Top Layer w0.254: v1(29.003,67.39) U1.23@42.415,67.39 ; v1@29.075,67.318 cw(c29.248,67.145) 29.248,67.39 cw(c29.248,67.635) v1@29.075,67.462
  Bottom Layer w0.254: bianmaqi1.2@7.124,30.607 ccw(c5.62,30.607) 6.683,31.671 ccw(c7.747,32.734) bianmaqi1.2@7.747,31.23 ; bianmaqi1.2@7.378,30.607 ccw(c6.487,30.607) 7.117,31.237 ccw(c7.747,31.867) bianmaqi1.2@7.747,30.976 ; bianmaqi1.2@7.747,30.607 3.429,34.925 3.429,53.594 5.842,56.007 19.872,56.007 22.032,58.167 22.032,60.419 v1(29.003,67.39) ; v1@28.901,67.39 cw(c28.656,67.39) 28.83,67.217 cw(c29.003,67.043) v1@29.003,67.288
WHITE2: bianmaqi2.2 U1.59 | length 63.3
  Top Layer w0.254: U1.59@58.42,70.413 75.891,70.413 82.743,63.561 82.743,62.038 83.374,61.407 83.88,61.407 86.426,58.861 86.426,32.955 87.503,31.878 ; bianmaqi2.2@87.22,31.416 ccw(c86.985,31.878) 87.503,31.878 ; bianmaqi2.2@87.503,30.861 87.503,31.878 ; bianmaqi2.2@87.786,31.416 cw(c88.021,31.878) 87.503,31.878
X: U1.18 XYZ1.3 | length 17.4
  Top Layer w0.254: v1(39.497,69.596) 39.791,69.89 U1.18@42.415,69.89 ; v1@43.307,61.874 cw(c43.307,61.308) 43.708,61.708 ; v1(43.307,61.976) 43.44,61.976 44.342,61.074 44.717,61.074 XYZ1.3@45.593,60.198
  Bottom Layer w0.254: v1@39.425,69.524 cw(c39.252,69.351) 39.497,69.351 cw(c39.742,69.351) v1@39.569,69.524 ; v1(39.497,69.596) 39.497,67.609 39.764,67.342 39.764,64.31 41.076,64.31 41.299,64.087 41.323,64.087 v1@43.434,61.976 ; 43.044,62.366 cw(c42.654,61.976) v1@43.205,61.976
Y: U1.17 XYZ1.5 | length 19.9
  Top Layer w0.254: v1(38.862,70.104) 39.148,70.39 U1.17@42.415,70.39
  Bottom Layer w0.254: v1@38.79,70.032 cw(c38.617,69.859) 38.862,69.859 cw(c39.107,69.859) v1@38.934,70.032 ; v1(38.862,70.104) 38.862,67.602 39.31,67.154 39.31,63.941 XYZ1.5@43.053,60.198 ; XYZ1.5@42.43,60.198 ccw(c40.926,60.198) 41.989,61.262 ccw(c43.053,62.325) XYZ1.5@43.053,60.821 ; XYZ1.5@42.684,60.198 ccw(c41.793,60.198) 42.423,60.828 ccw(c43.053,61.458) XYZ1.5@43.053,60.567 ; XYZ1.5@42.917,60.334 ccw(c43.307,60.724) XYZ1.5@43.307,60.173
Z: U1.15 XYZ1.7 | length 21.5
  Top Layer w0.254: v1(37.338,70.612) 37.981,71.255 37.981,71.382 37.989,71.39 U1.15@42.415,71.39 ; v1@37.338,70.714 ccw(c37.338,70.959) 37.511,70.785 ccw(c37.685,70.612) v1@37.44,70.612
  Bottom Layer w0.254: v1@37.266,70.54 cw(c37.093,70.367) 37.338,70.367 cw(c37.583,70.367) v1@37.41,70.54 ; v1(37.338,70.612) 37.338,67.842 38.402,66.778 38.402,62.563 40.513,60.452 XYZ1.7@40.513,60.198 ; 39.27,61.695 cw(c37.773,60.198) XYZ1.7@39.89,60.198 ; 39.703,61.262 cw(c38.64,60.198) XYZ1.7@40.144,60.198 ; 39.883,61.082 ccw(c40.513,61.712) XYZ1.7@40.513,60.821
pads on no net: 8. extra.5 JTAG.3 JTAG.5 JTAG.11 JTAG.13 JTAG.15 JTAG.17 JTAG.19 K1.3 K2.1 NOKIA1.8 XYZ1.1
copper on no net: | length 8.9
  Top Layer w0.2: 194.945,14.986 195.072,15.113 ; 195.931,21.433 196.312,21.052
  Top Layer w0.254: 57.223,48.515 57.356,48.382 57.356,41.172 57.658,40.87 57.658,40.513
  other v2: 2.54,25.4 45.974,25.4 51.308,25.4 79.375,25.4 94.869,25.4 30.099,25.654 94.869,30.48 2.54,30.607 33.782,57.15 58.928,57.15 2.54,94.742 94.869,94.742
  other v6: 1.778,3.81 46.863,3.81 50.546,3.81 95.631,3.81

## Polygon pours and split planes (outlines as drawn)
GND on Bottom Layer "Top Layer-No Net" (solid, remove dead copper): -7.874,103.886 95.377,103.886 119.38,79.883 101.473,61.976 101.473,27.305 -5.207,27.305 -5.715,27.813
GND2 on Bottom Layer "Top Layer-No Net" (solid, remove dead copper): 0,27.94 49.022,27.94 49.022,0.322 48.7,0 48.446,0.254 0,0.254
GND4 on Bottom Layer "Top Layer-No Net" (solid, remove dead copper): 48.006,27.813 48.133,27.94 97.536,27.94 97.536,0 97.282,-0.254 96.52,0.508 48.641,0.508
GND on Top Layer "Top Layer-No Net" (solid, remove dead copper): -0.381,97.663 97.663,97.663 97.79,97.536 97.917,97.409 97.917,27.432 0.635,27.432 0,28.067
GND2 on Top Layer "Top Layer-No Net" (solid, remove dead copper): 0,27.94 48.704,27.94 48.768,27.877 48.768,0.381 0.127,0.381 0,0.254
GND4 on Top Layer "Top Layer-No Net" (solid, remove dead copper): 48.704,27.94 97.536,27.94 97.663,27.813 97.536,27.686 97.536,0.254 48.895,0.254
no net on Internal Plane 1 (split plane): 98.19,-0.79 -0.79,-0.79 -0.79,98.19 98.19,98.19
no net on Internal Plane 2 (split plane): 98.19,-0.79 -0.79,-0.79 -0.79,98.19 98.19,98.19

## Keep-outs
Keep-Out Layer:
  lines w0.254: -0.013,94.742 cw(c2.54,94.742) 2.406,97.291 ; 0.118,30.473 ccw(c2.667,30.607) 2.667,28.054 ; 0.254,27.94 97.155,27.94 ; 48.7,0 48.7,27.94 ; 94.869,97.295 cw(c94.869,94.742) 97.418,94.876 ; 94.996,27.94 ccw(c94.862,30.489) 97.415,30.489
  lines w0.3: 0,0 0,97.4 97.4,97.4 97.4,0 0,0

## Other copper
Top Layer:
  rectangle net OUT4: 76.581,34.417 77.216,35.052
  rectangle net OUT4: 78.613,31.877 79.629,33.147
  rectangle net OUT4: 77.724,32.639 78.74,33.909
  rectangle net OUT4: 76.835,33.528 77.851,34.798

## Silkscreen, mask and mechanical layers (free items; w line width, h text height)
Drill Drawing:
  text ".LEGEND" at 103.78,3.78 h1.52
  text "Drill Drawing." at 103.78,1.24 h1.52

## Dimensions
0,0 to 0,97.4 on Mechanical 1
0,0 to 97.4,0 on Mechanical 1

## Text inside footprints (layer, text, board x,y; h text height)
bianmaqi1: Top Overlay "1" at 10.795,28.575 h1.27 r90; Top Overlay "2" at 8.255,28.067 h1.27 r90; Top Overlay "4" at 8.255,34.671 h1.27 r90; Top Overlay "3" at 10.795,34.671 h1.27 r90
bianmaqi2: Top Overlay "1" at 90.551,28.829 h1.27 r90; Top Overlay "2" at 88.011,28.321 h1.27 r90; Top Overlay "4" at 88.011,34.925 h1.27 r90; Top Overlay "3" at 90.551,34.925 h1.27 r90
camera1: Top Overlay "17" at 6.223,95.25 h1.27 r180; Top Overlay "18" at 6.223,92.71 h1.27 r180
extra: Top Overlay "6" at 77.724,44.069 h1.27 r270; Top Overlay "5" at 75.184,44.069 h1.27 r270; Top Overlay "2" at 77.724,53.213 h1.27 r270; Top Overlay "1" at 75.184,52.705 h1.27 r270
XYZ1: Top Overlay "2" at 50.673,58.166 h1.27 r180; Top Overlay "1" at 50.165,60.706 h1.27 r180; Top Overlay "7" at 38.989,60.706 h1.27 r180; Top Overlay "8" at 38.989,58.166 h1.27 r180